# Altium PCB Copy of PCB1.PcbDoc (part 3 of 9)
Units mm, origin at the board's own origin, x right, y up, seen from the top; angles counter-clockwise.
Board outline 100 x 100 mm, 6 copper layers (Top Layer, Int1 (GND), Int2 (Sign), Int3 (Sign), Int4 (PWR), Bottom Layer), stack 1.538 mm thick; 614 components, 712 nets, 3013 pads, 501 vias.
Unrouted connection lines stored in the file: 259.
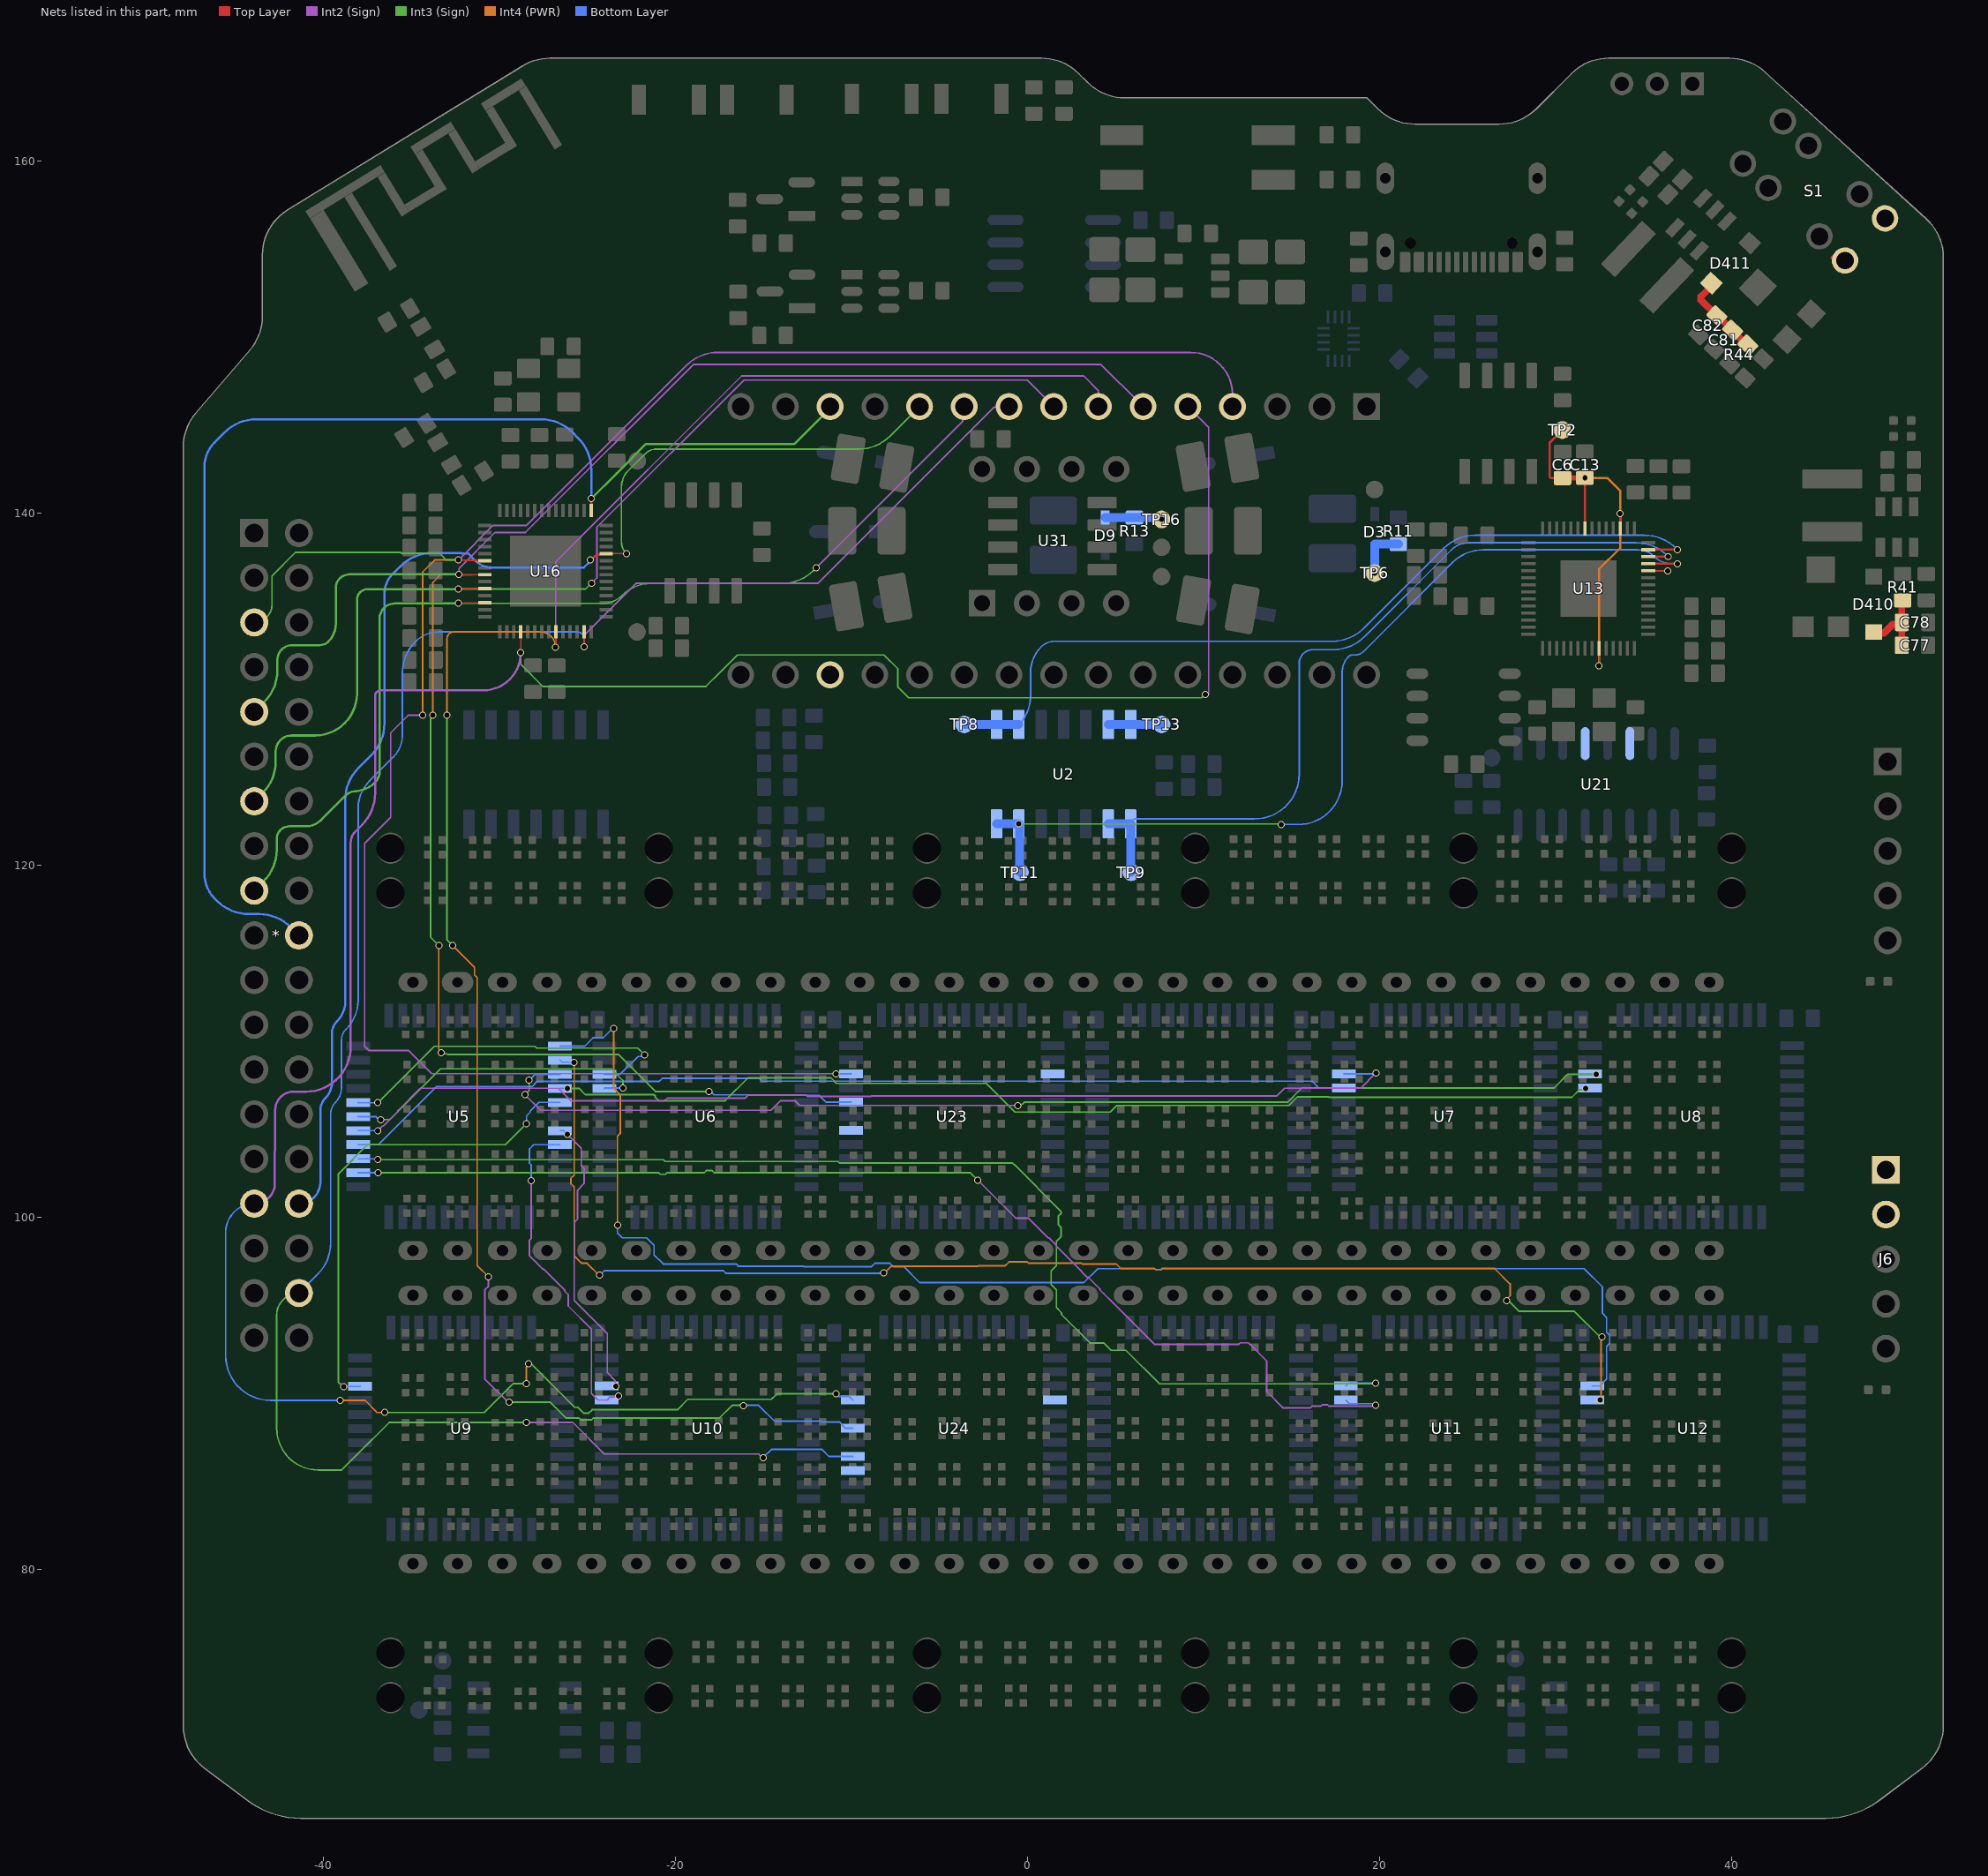
[diagram p6: the nets of this part, all layers, seen from the top]

## Via types
v1: diameter 0.4, hole 0.3, Top Layer to Bottom Layer, tented both sides, 494 vias
v2: diameter 0.4, hole 0.3, Top Layer to Bottom Layer, 5 vias
v3: diameter 0.4, hole 0.3, Top Layer to Bottom Layer, tented top, 1 vias
v4: diameter 0.6, hole 0.5, Top Layer to Bottom Layer, 1 vias

## Nets (pads, with @x,y where several pads share a name; then routed paths per layer and width w, separated by ;. In a path a pad name is that pad's centre, name@x,y a point inside that pad or via, vN(x,y) a via of type N, cw(c..) or ccw(c..) an arc to the next point about the centre after c; other vN are vias at no path point) (continued)
ADC_BUFF_5V_1_1: (continued)
  Bottom Layer w0.5: U2.9@4.575,122.358 U2.8@5.845,122.358 5.858,122.344 5.858,119.622 TP9.1@5.872,119.608
ADC_BUFF_5V_2_1: TP11.1 U2.13 U2.14 U13.39 | length 54
  Top Layer w0.09: v1@14.321,122.358 cw(c14.321,122.246) v1(14.4,122.325)
  Top Layer w0.127: U13.39@35.26,137.135 v2(36.918,137.135)
  Int3 (Sign) w0.09: v1(-0.505,122.358) 14.321,122.358 cw(c14.321,122.246) v1(14.4,122.325)
  Bottom Layer w0.09: v1(14.4,122.325) 15.387,122.325 ccw(c15.387,124.778) 17.121,123.043 ccw(c15.325,124.839) 17.865,124.839 17.865,131.005 cw(c19.072,131.005) 18.219,131.859 cw(c18.45,131.627) 18.45,131.955 18.615,131.955 ccw(c18.615,132.588) 19.063,132.14 24.113,137.191 cw(c25.909,135.395) 25.909,137.935 34.65,137.935 cw(c34.65,136.587) 35.603,137.54 ccw(c36.582,138.518) 36.582,137.135 v2(36.918,137.135)
  Bottom Layer w0.5: U2.14@-1.775,122.358 v1(-0.505,122.358) -0.475,122.328 -0.475,119.638 TP11.1@-0.445,119.608
ADC_BUFF_+-8V_1: TP13.1 U2.6 U2.7 U13.38 | length 4.1
  Top Layer w0.09: U13.38@35.26,136.735 v1(36.36,136.735)
  Bottom Layer w0.5: U2.6@4.575,128.008 U2.7@5.845,128.008 TP13.1@7.605,128.008
AE0_3: U5.5 U9.31 | length 27.8
  Int3 (Sign) w0.09: v1(-38.877,90.39) -39.015,90.528 -39.065,90.528 -39.165,90.628 -39.165,102.484 -37.517,104.133 -29.676,104.133 v1(-28.482,105.326) v1(-28.482,105.326)
  Bottom Layer w0.09: v1(-38.877,90.39) -37.948,90.39 U9.31@-37.93,90.408 ; v1(-28.482,105.326) -28.479,105.328 -28.479,105.773 -28.278,105.974 -28.278,106.038 -27.783,106.533 U5.5@-26.578,106.533
AF0_3: U5.7 U10.31 | length 16.4
  Int2 (Sign) w0.09: v1(-26.148,104.71) -25.369,103.932 -25.369,102.962 -25.209,102.802 -25.209,101.924 -25.58,101.554 -25.58,99.908 -25.769,99.718 -25.769,95.277 -23.889,93.397 -23.889,91.184 -23.454,90.749 -23.454,90.47 v1(-23.398,90.414)
  Bottom Layer w0.09: U5.7@-26.578,104.933 -26.371,104.933 v1(-26.148,104.71)
AF1_3: U5.8 U10.30 | length 19.9
  Int2 (Sign) w0.09: v1(-28.212,102.078) -28.212,98.813 -28.309,98.716 -28.309,97.817 -27.55,97.057 -27.498,97.057 -26.315,95.875 -26.315,95.823 -26.108,95.615 -26.108,94.97 -24.79,93.652 -24.79,90.003 -24.41,89.623 -23.896,89.623 -23.753,89.766 -23.625,89.766 -23.58,89.811 -23.28,89.811 v1(-23.245,89.846)
  Bottom Layer w0.09: v1(-28.212,102.078) -28.212,102.975 -28.313,103.076 -28.313,103.888 -28.068,104.133 U5.8@-26.578,104.133 ; U10.30@-23.93,89.623 -23.738,89.815 -23.276,89.815 v1(-23.245,89.846)
AG0_3: U5.25 U11.31 | length 68.9
  Int3 (Sign) w0.09: v1(-36.926,103.282) -20.705,103.282 -20.601,103.178 -10.782,103.178 -10.698,103.093 -0.873,103.093 -0.776,102.996 -0.762,102.996 1.886,100.348 1.886,100.213 1.734,100.061 1.734,99.595 1.886,99.443 1.886,98.897 1.625,98.636 1.625,97.264 1.324,96.964 1.324,96.175 1.625,95.875 1.625,94.876 1.916,94.585 1.916,94.479 3.525,92.87 4.314,92.87 4.732,92.452 5.574,92.452 7.483,90.543 19.723,90.543 v1(19.771,90.591)
  Bottom Layer w0.09: U5.25@-38.048,103.333 -36.977,103.333 v1(-36.926,103.282) ; U11.31@18.07,90.423 18.238,90.591 v1(19.771,90.591)
AG1_3: U5.24 U11.30 | length 66.6
  Int2 (Sign) w0.09: v1(-2.841,102.113) -0.69,99.961 0.026,99.961 1.15,98.838 1.202,98.838 1.625,98.415 1.625,98.363 2.777,97.211 2.777,97.208 3.391,96.593 3.446,96.593 4.098,95.942 4.098,95.889 4.316,95.671 4.8,95.187 7.192,92.795 11.985,92.795 12.066,92.876 12.532,92.876 12.612,92.795 12.628,92.795 13.573,91.851 13.573,90.118 14.517,89.173 16.05,89.173 16.15,89.273 16.642,89.273 16.722,89.353 17.031,89.353 17.111,89.273 19.708,89.273 v1(19.764,89.329)
  Int3 (Sign) w0.09: v1(-36.901,102.533) -20.96,102.533 -20.884,102.457 -20.576,102.457 -20.499,102.533 -18.391,102.533 -18.256,102.667 -17.948,102.667 -17.813,102.533 -3.261,102.533 v1(-2.841,102.113)
  Bottom Layer w0.09: U5.24@-38.048,102.533 v1(-36.901,102.533) ; U11.30@18.07,89.623 18.275,89.418 19.591,89.418 19.68,89.329 v1(19.764,89.329)
AH0_3: U5.1 U12.31 | length 80.2
  Int4 (PWR) w0.09: v1(-23.52,110.738) -23.52,107.34 -23.154,106.974 -23.154,104.773 -23.31,104.617 v1(-23.31,99.559)
  Bottom Layer w0.09: U5.1@-26.578,109.733 -25.178,109.733 -24.705,110.206 -24.127,110.206 -23.595,110.738 v1(-23.52,110.738) ; v1(-23.31,99.559) -23.31,99.12 -23.028,98.838 -21.658,98.838 -21.235,98.415 -21.235,97.875 -20.714,97.354 -16.578,97.354 -16.456,97.232 -12.753,97.232 -12.725,97.204 -8.88,97.204 -8.69,97.394 -7.835,97.394 -7.645,97.204 -7.041,97.204 -6.135,96.298 3.184,96.298 3.978,97.092 7.203,97.092 7.257,97.038 7.566,97.038 7.62,97.092 31.606,97.092 32.651,96.048 32.651,94.552 32.89,94.313 32.89,93.471 33.064,93.296 33.064,92.848 32.89,92.674 32.89,90.818 32.495,90.423 U12.31@32.07,90.423
AH1_3: U5.2 U12.30 | length 77.6
  Int3 (Sign) w0.09: v1(27.199,95.277) 27.283,95.277 27.378,95.182 27.397,95.182 27.915,94.664 31.058,94.664 32.458,93.264 32.57,93.264 v1(32.63,93.205)
  Int4 (PWR) w0.09: v1(-25.776,108.816) -25.776,102.411 -25.96,102.227 -25.96,101.918 -25.776,101.734 -25.776,97.823 -25.346,97.394 -25.036,97.394 -24.355,96.713 v1(-24.33,96.713) ; v1(-8.195,96.86) -8.119,96.86 -7.747,97.232 -2.843,97.232 -2.818,97.257 -1.284,97.257 -1.063,97.478 -0.031,97.478 0.054,97.394 3.044,97.394 3.089,97.349 5.035,97.349 5.283,97.101 7.194,97.101 7.257,97.038 7.566,97.038 7.629,97.101 26.524,97.101 27.404,96.221 27.404,95.545 27.199,95.34 v1(27.199,95.277) ; v1(32.518,89.641) 32.574,89.697 32.574,93.149 v1(32.63,93.205)
  Bottom Layer w0.09: U5.2@-26.578,108.933 -26.461,108.816 v1(-25.776,108.816) ; v1(-24.33,96.713) -24.069,96.974 -17.304,96.974 -17.156,96.826 -8.229,96.826 v1(-8.195,96.86)

## Text inside footprints (layer, text, board x,y; h text height)
D1: Mechanical 13 "+" at 0.956,162.141 h0.5 r270
U4: Bottom Overlay "*" at 19.36,150.949 h0.3
U16: Top Overlay "*" at -31.873,139.477 h0.3